# EAGLE board pcb_v37 (EAGLE 9.7.0)
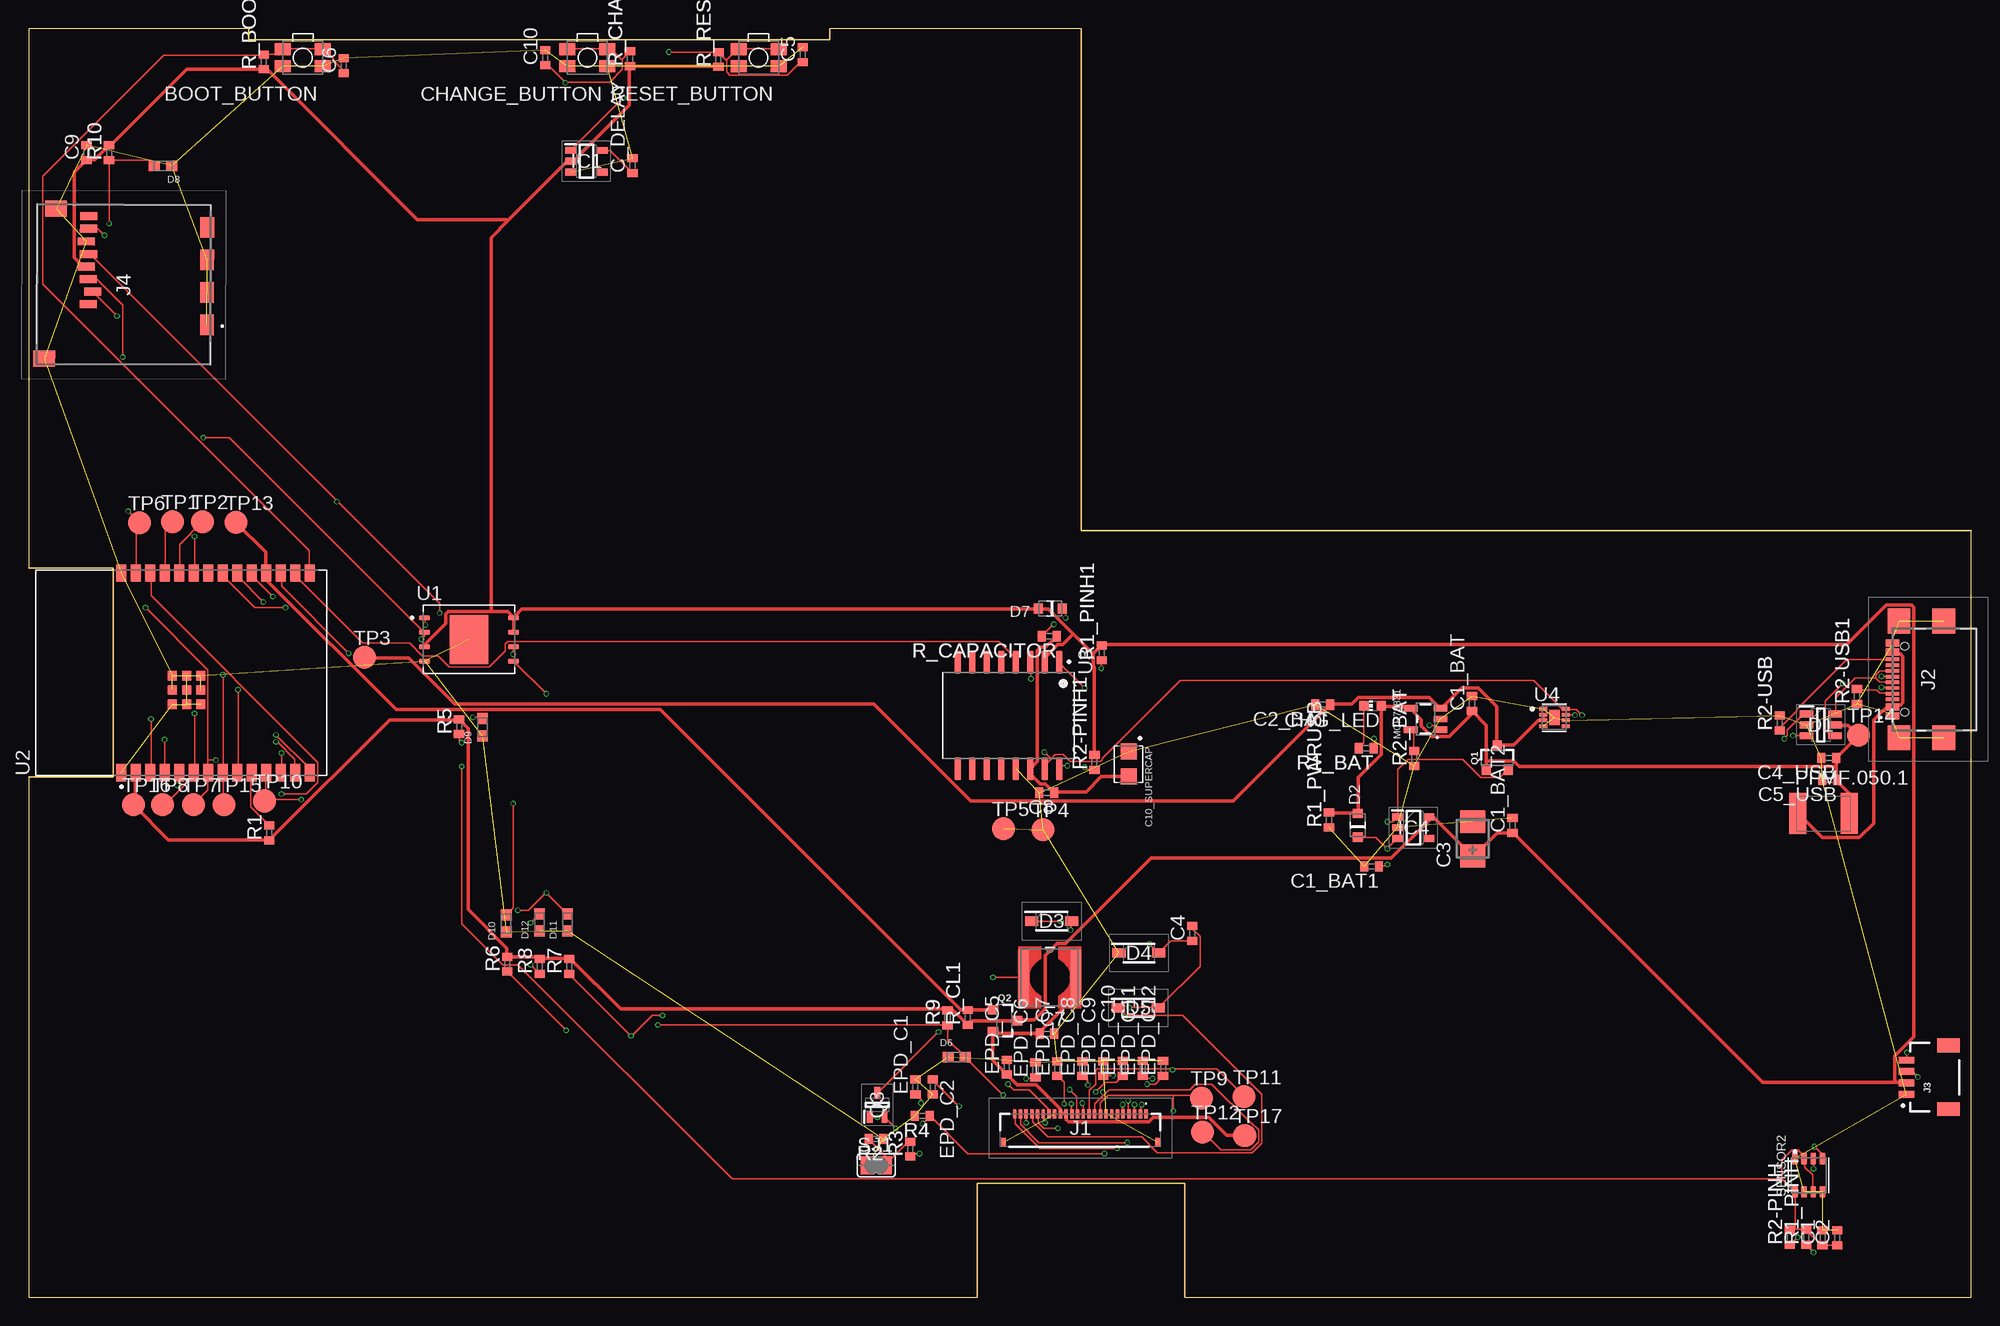
[diagram p0: board, top side]
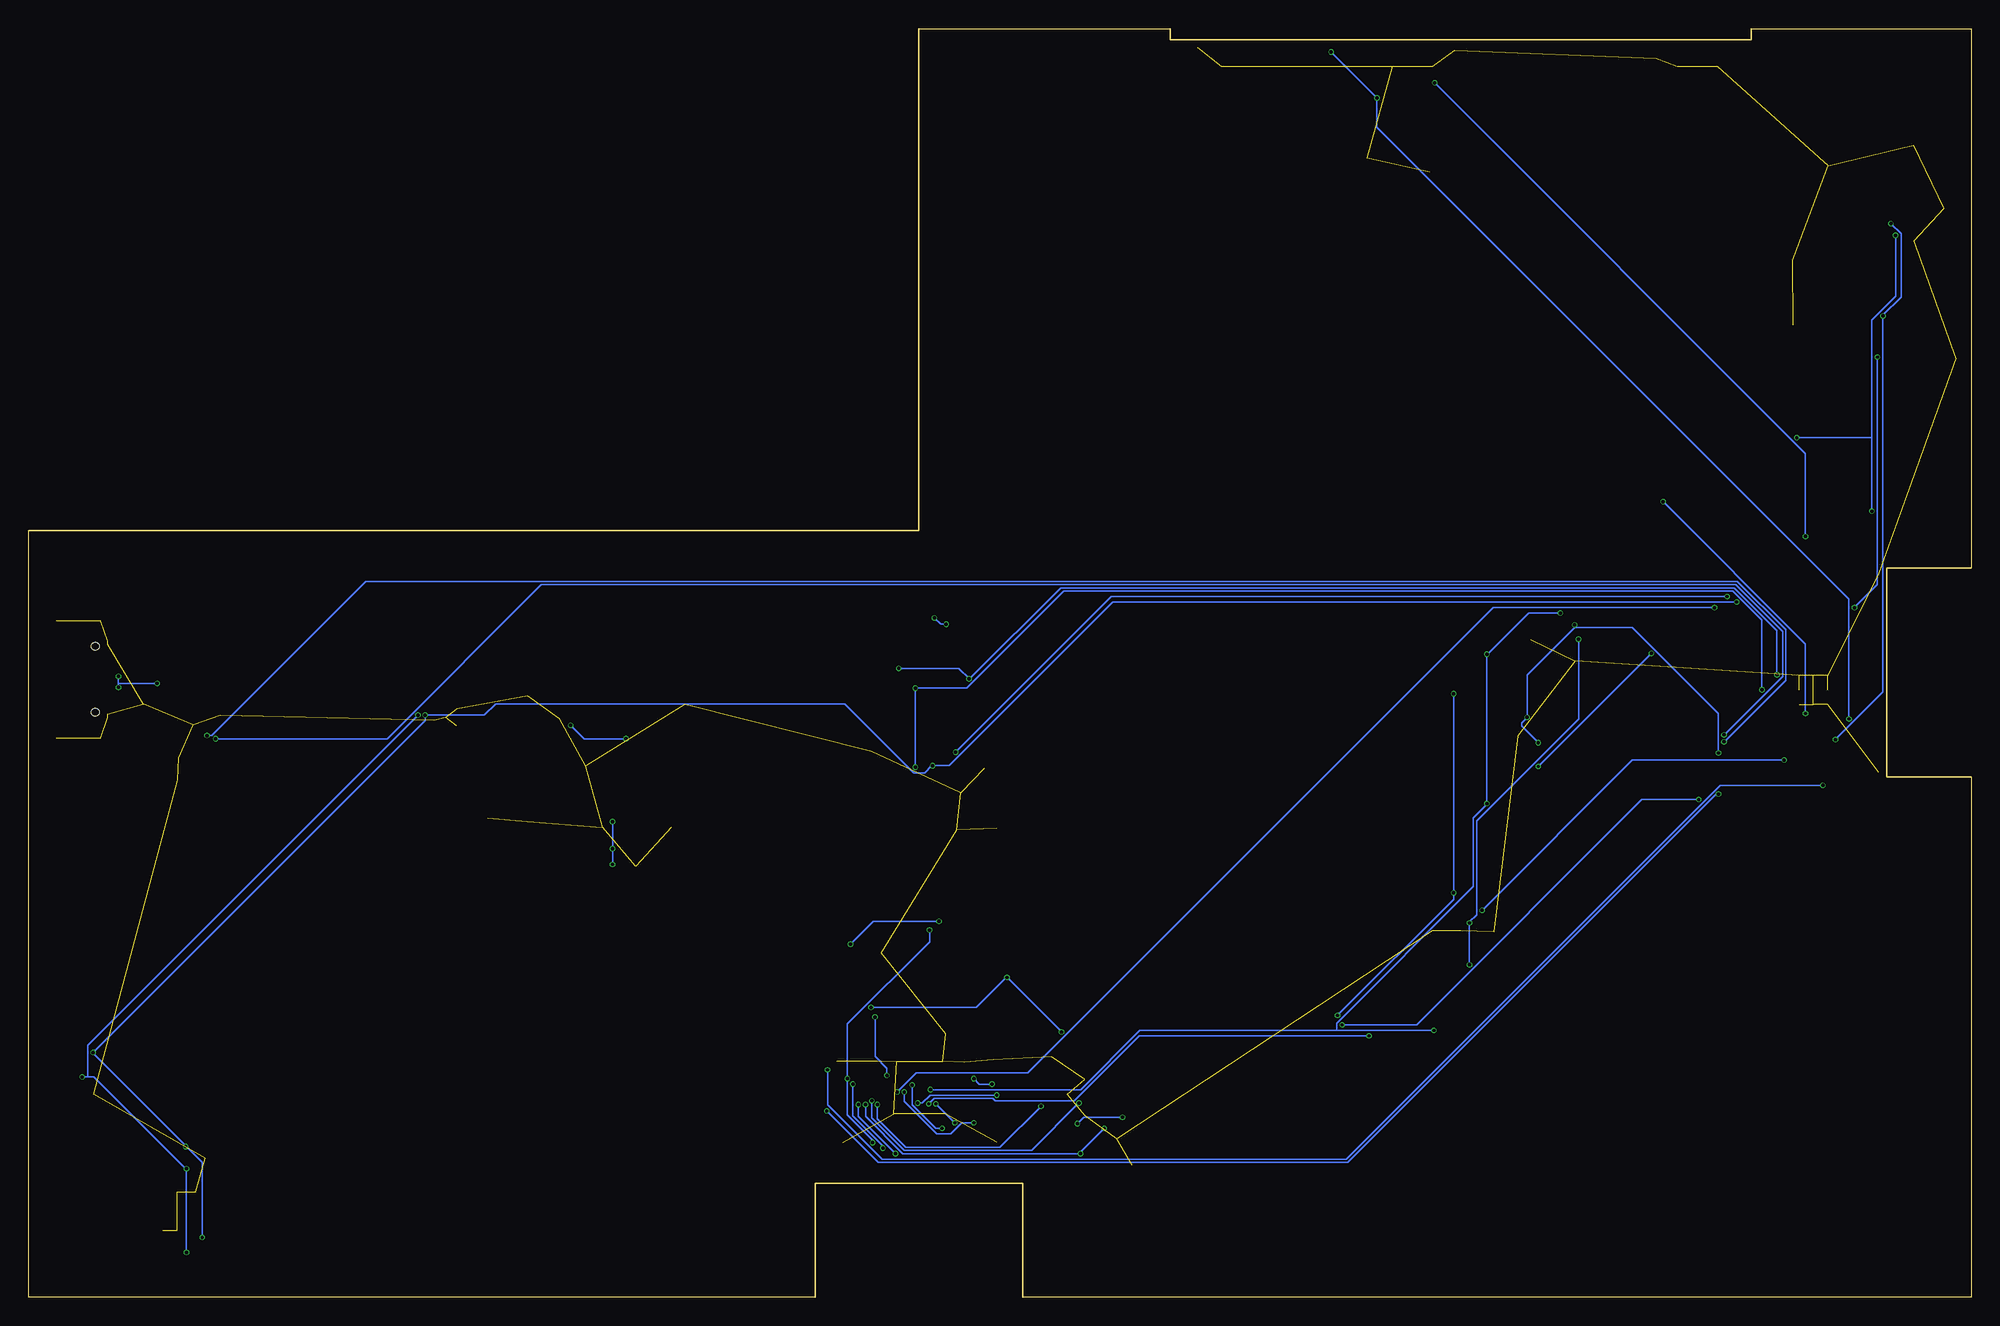
[diagram p1: board, bottom side, seen from below]

Size 170.2 x 111.2 mm. Coordinates in mm from the lower left corner, seen from the top.
Outline: 0,0 83.1,0 83.1,10 101.3,10 101.3,0 170.2,0 170.2,67.2 92.2,67.2 92.2,111.2 70.2,111.2 70.2,110.2 19.3,110.2 19.3,111.2 0,111.2 0,63.9 7.4,63.9 7.4,45.6 0,45.6 0,0
Copper layers (1*16): Top 0.035mm / dielectric 1.6mm / Bottom 0.035mm
Design rules "jlcpcb-2layers.dru": minimum track width 5mil, minimum drill 0.3mm, track to track 5mil, track to pad 5mil, pad to pad 5mil, via to via 5mil, smd to smd 5mil, copper to edge 0.2mm, drill to drill 6mil, minimum pad ring 10mil, minimum via ring 3mil, stop-mask expansion 4mil, vias tented up to drill 0mil, thermal gap 10mil
Net classes: 0 default: width 0.15 mm; 1 POWER: width 0.3 mm

## Footprints (pad centres in the part's own frame; a part is rotated, then mirrored left to right if it is on the bottom)
MYBUTTON = smd 1.4 x 1.05: 1 1.75,0.75; 2 -1.75,0.75; 3 -1.75,-0.75; 4 1.75,-0.75
ESP32_WROVER_EAGLE-LTSPICE_C0402 = smd 0.7 x 0.9: 1 -0.65,0; 2 0.65,0
RCL_CT3528 = smd 2 x 2.2: + -1.5,0; - 1.5,0
CAPCP3225X100N = smd 1.4 x 1.4: 1 -1.1,0; 2 1.1,0
ADAFRUIT_CHIP-LED0603 = smd 0.8 x 0.8: A 0,-0.75; C 0,0.75
SOT95P280X145-6N = smd 1.2 x 0.6: 1 -1.25,0.95; 2 -1.25,0; 3 -1.25,-0.95; 4 1.25,-0.95; 5 1.25,0; 6 1.25,0.95
ESP32_WROVER_AVX---SD0805S020S1R0_AVX_SD0805S020S1R0_0 = smd 0.8 x 0.9: 1 -1.05,0; 2 1.05,0
SOD3716X135N = smd 1.15 x 0.8: 1 -1.75,0; 2 1.75,0
DIOC1608X36N = smd 0.97 x 0.94: 1 -0.75,0; 2 0.75,0
SOT95P280X125-5N = smd 0.9 x 0.6: 1 -1.4,0.95; 2 -1.4,0; 3 -1.4,-0.95; 4 1.4,-0.95; 5 1.4,0.95
SOT95P280X120-5N = smd 0.9 x 0.6: 1 -1.4,0.95; 2 -1.4,0; 3 -1.4,-0.95; 4 1.4,-0.95; 5 1.4,0.95
FH34SRJ24S05SH99 = smd 0.3 x 0.8: 1 5.75,1.45; 2 5.25,1.45; 3 4.75,1.45; 4 4.25,1.45; 5 3.75,1.45; 6 3.25,1.45; 7 2.75,1.45; 8 2.25,1.45; 9 1.75,1.45; 10 1.25,1.45; 11 0.75,1.45; 12 0.25,1.45; 13 -0.25,1.45; 14 -0.75,1.45; 15 -1.25,1.45; 16 -1.75,1.45; 17 -2.25,1.45; 18 -2.75,1.45; 19 -3.25,1.45; 20 -3.75,1.45; 21 -4.25,1.45; 22 -4.75,1.45; 23 -5.25,1.45; 24 -5.75,1.45 | smd 0.4 x 0.8: MP1 6.75,-1.05; MP2 -6.75,-1.05
SAMACSYS_PARTS_USB4110GFA = smd 0.3 x 1.15: A1 -3.35,3.678; A4 -2.55,3.678; A5 -1.25,3.678; A6 -0.25,3.678; A7 0.25,3.678; A8 1.25,3.678; A9 2.55,3.678; A12 3.35,3.678; B1 3.05,3.678; B4 2.25,3.678; B5 1.75,3.678; B6 0.75,3.678; B7 -0.75,3.678; B8 -1.75,3.678; B9 -2.25,3.678; B12 -3.05,3.678 | smd 2.18 x 2: MP1 -5.11,-0.827; MP2 5.11,-0.827; MP3 -5.11,3.103; MP4 5.11,3.103 | hole 0.65: -2.89,2.603; 2.89,2.603
JST04_1MM_RA = smd 0.6 x 1.35: 1 -1.5,0; 2 -0.5,0; 3 0.5,0; 4 1.5,0 | smd 1.2 x 2: NC1 2.8,-3.675; NC2 -2.8,-3.675
112ATAARR03ATTEND = smd 1.8 x 1.2: G1 10.6,10.4; G2 4.9,10.4; S1 7.75,10.4; S2 2.05,10.4 | smd 1.4 x 1.9: G3 13.6,-3.85; G4 0.45,-2.85 | smd 0.7 x 1.5: P1 8.8,0; P2 7.7,0.4; P3 6.6,0; P4 5.5,-0.2; P5 4.4,0; P6 3.3,-0.2; P7 2.2,0; P8 1.1,0
IND_4828-WE-TPC_WRE = smd 0.889 x 4.826: 1 -2.286,0; 2 2.286,0
ESP32_WROVER_SPARKFUN-IC-POWER_SOT23-5 = smd 0.55 x 1.2: 1 -0.95,-1.3; 2 0,-1.3; 3 0.95,-1.3; 4 0.95,1.3; 5 -0.95,1.3
ESP32C6_VARISTOR_CT/CN1812 = smd 1.5 x 3.6: 1 -2.25,0; 2 2.25,0
ESP32_WROVER_SPARKFUN-DISCRETESEMI_SOT23-3 = smd 0.8 x 0.9: 1 -0.95,-1; 2 0.95,-1; 3 0,1.1
SOT65P210X110-3N = smd 1.05 x 0.5: 1 -1.05,0.65; 2 -1.05,-0.65; 3 1.05,0
ESP32_WROVER_EAGLE-LTSPICE_R0402 = smd 0.7 x 0.9: 1 -0.65,0; 2 0.65,0
ESP32_WROVER_BME680_PSON80P300X300X100-8N = smd 1.016 x 0.5: 1 1.458,1.2; 2 1.458,0.4; 3 1.458,-0.4; 4 1.458,-1.2; 5 -1.458,-1.22; 6 -1.458,-0.4; 7 -1.458,0.4; 8 -1.458,1.2
SJ = smd 1.168 x 1.6: 1 -0.762,0; 2 0.762,0
TP20R = smd 2 x 2: TP 0,0
SON127P600X800X80-9N = smd 0.94 x 0.44: 1 -3.895,1.905; 2 -3.895,0.635; 3 -3.895,-0.635; 4 -3.895,-1.905; 5 3.895,-1.905; 6 3.895,-0.635; 7 3.895,0.635; 8 3.895,1.905 | smd 3.4 x 4.3: 9 0,0
XCVR_ESP32-C6-WROOM-1-N8 = smd 1.5 x 0.9: 1 -8.75,5.26; 2 -8.75,3.99; 3 -8.75,2.72; 4 -8.75,1.45; 5 -8.75,0.18; 6 -8.75,-1.09; 7 -8.75,-2.36; 8 -8.75,-3.63; 9 -8.75,-4.9; 10 -8.75,-6.17; 11 -8.75,-7.44; 12 -8.75,-8.71; 13 -8.75,-9.98; 14 -8.75,-11.25; 15 8.75,-11.25; 16 8.75,-9.98; 17 8.75,-8.71; 18 8.75,-7.44; 19 8.75,-6.17; 20 8.75,-4.9; 21 8.75,-3.63; 22 8.75,-2.36; 23 8.75,-1.09; 24 8.75,0.18; 25 8.75,1.45; 26 8.75,2.72; 27 8.75,3.99; 28 8.75,5.26 | smd 0.8 x 0.8: 29_1 -2.755,0.79; 29_2 -1.505,0.79; 29_3 -0.255,0.79; 29_4 -2.755,-0.46; 29_5 -1.505,-0.46; 29_6 -0.255,-0.46; 29_7 -2.755,-1.71; 29_8 -1.505,-1.71; 29_9 -0.255,-1.71
SOIC127P1032X265-16N = smd 2.05 x 0.59: 1 -4.655,4.445; 2 -4.655,3.175; 3 -4.655,1.905; 4 -4.655,0.635; 5 -4.655,-0.635; 6 -4.655,-1.905; 7 -4.655,-3.175; 8 -4.655,-4.445; 9 4.655,-4.445; 10 4.655,-3.175; 11 4.655,-1.905; 12 4.655,-0.635; 13 4.655,0.635; 14 4.655,1.905; 15 4.655,3.175; 16 4.655,4.445
SON50P200X200X80-9N = smd 0.76 x 0.3: 1 -0.985,0.75; 2 -0.985,0.25; 3 -0.985,-0.25; 4 -0.985,-0.75; 5 0.985,-0.75; 6 0.985,-0.25; 7 0.985,0.25; 8 0.985,0.75 | smd 0.9 x 1.3: 9 0,0

## Placement (x,y rotation side)
BOOT_BUTTON  BUTTON_CUSYOMV1  [MYBUTTON]  24.03,108.65 180 top
C1  100nF  [ESP32_WROVER_EAGLE-LTSPICE_C0402]  157.16,5.23 90 top
C1_BAT  4.7uF  [ESP32_WROVER_EAGLE-LTSPICE_C0402]  126.45,52.05 90 top
C1_BAT1  4.7uF  [ESP32_WROVER_EAGLE-LTSPICE_C0402]  117.65,37.77 180 top
C1_BAT2  4.7uF  [ESP32_WROVER_EAGLE-LTSPICE_C0402]  129.99,41.37 90 top
C2  100nF  [ESP32_WROVER_EAGLE-LTSPICE_C0402]  158.44,5.23 90 top
C2_BAT  4.7uF  [ESP32_WROVER_EAGLE-LTSPICE_C0402]  113.36,51.95 180 top
C3  100uF TANT  [RCL_CT3528]  126.51,40.2 90 top
C4  4.7uF/25V  [ESP32_WROVER_EAGLE-LTSPICE_C0402]  101.95,31.89 90 top
C4_USB  100nF  [ESP32_WROVER_EAGLE-LTSPICE_C0402]  157.7,47.27 180 top
C5  1uF  [ESP32_WROVER_EAGLE-LTSPICE_C0402]  67.82,108.91 90 top
C5_USB  4.7uF  [ESP32_WROVER_EAGLE-LTSPICE_C0402]  157.78,45.35 180 top
C6  100nF  [ESP32_WROVER_EAGLE-LTSPICE_C0402]  27.62,107.93 90 top
C7  10uF  [ESP32_WROVER_EAGLE-LTSPICE_C0402]  89.22,23.11 0 top
C8  100nF  [ESP32_WROVER_EAGLE-LTSPICE_C0402]  89.2,44.23 180 top
C9  100nF  [ESP32_WROVER_EAGLE-LTSPICE_C0402]  5.08,100.33 90 top
C10  100nF  [ESP32_WROVER_EAGLE-LTSPICE_C0402]  45.26,108.63 90 top
C10_SUPERCAP  CPH3225A  [CAPCP3225X100N]  96.36,46.74 270 top
C_DELAY  100nF  [ESP32_WROVER_EAGLE-LTSPICE_C0402]  52.91,99.19 90 top
CHANGE_BUTTON  BUTTON_CUSYOMV1  [MYBUTTON]  48.96,108.63 180 top
CHG_LED  [ADAFRUIT_CHIP-LED0603]  117.74,51.85 90 top
D1  USBLC6-2SC6Y  [SOT95P280X145-6N]  157,50.17 0 top
D2  ESP32_WROVER_AVX---SD0805S020S1R0_AVX_SD0805S020S1R0_0_0AVX_SD0805S020S1R0_0_0  [ESP32_WROVER_AVX---SD0805S020S1R0_AVX_SD0805S020S1R0_0]  116.44,41.38 90 top
D3  MBR0530  [SOD3716X135N]  89.63,32.98 0 top
D4  MBR0530  [SOD3716X135N]  97.27,30.18 0 top
D5  MBR0530  [SOD3716X135N]  97.21,25.38 0 top
D6  PGB1010603MR  [DIOC1608X36N]  81.3,21.07 0 top
D7  ESP32_WROVER_AVX---SD0805S020S1R0_AVX_SD0805S020S1R0_0_0AVX_SD0805S020S1R0_0_0  [ESP32_WROVER_AVX---SD0805S020S1R0_AVX_SD0805S020S1R0_0]  89.49,60.38 180 top
D8  PGB1010603MR  [DIOC1608X36N]  11.78,99.17 180 top
D9  PGB1010603MR  [DIOC1608X36N]  39.76,49.97 90 top
D10  PGB1010603MR  [DIOC1608X36N]  41.84,32.77 90 top
D11  PGB1010603MR  [DIOC1608X36N]  47.22,32.87 90 top
D12  PGB1010603MR  [DIOC1608X36N]  44.75,32.88 90 top
EPD_C1  1uF/50V  [ESP32_WROVER_EAGLE-LTSPICE_C0402]  77.69,18.45 90 top
EPD_C2  1uF/50V  [ESP32_WROVER_EAGLE-LTSPICE_C0402]  79.2,18.45 270 top
EPD_C5  0.1uF/50V  [ESP32_WROVER_EAGLE-LTSPICE_C0402]  85.69,20.19 90 top
EPD_C6  1uF/50V  [ESP32_WROVER_EAGLE-LTSPICE_C0402]  88.21,19.95 90 top
EPD_C7  1uF/50V  [ESP32_WROVER_EAGLE-LTSPICE_C0402]  90.12,20.05 90 top
EPD_C8  1uF/50  [ESP32_WROVER_EAGLE-LTSPICE_C0402]  92.33,20.05 90 top
EPD_C9  1uF/50V  [ESP32_WROVER_EAGLE-LTSPICE_C0402]  94.14,20.05 90 top
EPD_C10  1uF/50V  [ESP32_WROVER_EAGLE-LTSPICE_C0402]  95.85,20.09 90 top
EPD_C11  1uF/50V  [ESP32_WROVER_EAGLE-LTSPICE_C0402]  97.61,20.07 90 top
EPD_C12  1uF/50V  [ESP32_WROVER_EAGLE-LTSPICE_C0402]  99.39,20.09 90 top
IC1  BD5229G-TR  [SOT95P280X125-5N]  48.87,99.57 0 top
IC4  XC6220A331MR-G  [SOT95P280X120-5N]  121.31,41.17 0 top
J1  FH34SRJ-24S-0.5SH_99_  [FH34SRJ24S05SH99]  92.14,14.64 0 top
J2  SAMACSYS_PARTS_USB4110-GF-A  [SAMACSYS_PARTS_USB4110GFA]  166.96,54.16 90 top
J3  QWIIC_RIGHT_ANGLE  [JST04_1MM_RA]  164.51,19.3 90 top
J4  112A-TAAR-R03_ATTEND  [112ATAARR03ATTEND]  5.27,95.84 269.8 top
L1  68uH  [IND_4828-WE-TPC_WRE]  89.47,28.05 0 top
MCP73831  ESP32_WROVER_SPARKFUN-IC-POWER_MCP73831  [ESP32_WROVER_SPARKFUN-IC-POWER_SOT23-5]  122.38,50.69 90 top
PFMF.050.1  ESP32C6_VARISTORCN1812  [ESP32C6_VARISTOR_CT/CN1812]  157.24,42.4 0 top
Q1  20V/4.2A/52mΩ/1.4W  [ESP32_WROVER_SPARKFUN-DISCRETESEMI_SOT23-3]  128.66,47.26 0 top
Q2  20V/4.2A/52mΩ/1.4W  [ESP32_WROVER_SPARKFUN-DISCRETESEMI_SOT23-3]  85.48,24.26 270 top
Q3  SI1308EDL-T1-GE3  [SOT65P210X110-3N]  74.34,16.88 90 top
R1  10K  [ESP32_WROVER_EAGLE-LTSPICE_R0402]  21.08,40.71 90 top
R1_BAT  200  [ESP32_WROVER_EAGLE-LTSPICE_R0402]  117.18,48.13 180 top
R1_PINH  10K  [ESP32_WROVER_EAGLE-LTSPICE_R0402]  155.73,5.27 90 top
R1_PINH1  10K  [ESP32_WROVER_EAGLE-LTSPICE_R0402]  94.01,56.49 90 top
R1_PWRUSB  100K  [ESP32_WROVER_EAGLE-LTSPICE_R0402]  113.92,41.84 90 top
R2  2.2  [ESP32_WROVER_EAGLE-LTSPICE_R0402]  74.24,13.91 180 top
R2-PINH  10K  [ESP32_WROVER_EAGLE-LTSPICE_R0402]  154.29,5.27 90 top
R2-PINH1  10K  [ESP32_WROVER_EAGLE-LTSPICE_R0402]  93.37,46.89 90 top
R2-USB  5K1  [ESP32_WROVER_EAGLE-LTSPICE_R0402]  153.4,50.33 90 top
R2-USB1  5K1  [ESP32_WROVER_EAGLE-LTSPICE_R0402]  160.17,52.67 90 top
R2_BAT  2K  [ESP32_WROVER_EAGLE-LTSPICE_R0402]  121.39,47.23 90 top
R3  0.47  [ESP32_WROVER_EAGLE-LTSPICE_R0402]  77.24,13.01 90 top
R4  10K  [ESP32_WROVER_EAGLE-LTSPICE_R0402]  78.3,15.91 180 top
R5  10K  [ESP32_WROVER_EAGLE-LTSPICE_R0402]  37.72,50.01 90 top
R6  10K  [ESP32_WROVER_EAGLE-LTSPICE_R0402]  41.94,29.21 90 top
R7  10K  [ESP32_WROVER_EAGLE-LTSPICE_R0402]  47.36,29.01 90 top
R8  10K  [ESP32_WROVER_EAGLE-LTSPICE_R0402]  44.78,29.01 90 top
R9  10K  [ESP32_WROVER_EAGLE-LTSPICE_R0402]  80.5,24.51 90 top
R10  10K  [ESP32_WROVER_EAGLE-LTSPICE_R0402]  7.06,100.31 90 top
R_BOOT  10k  [ESP32_WROVER_EAGLE-LTSPICE_R0402]  20.6,108.27 90 top
R_CAPACITOR  15  [ESP32_WROVER_EAGLE-LTSPICE_R0402]  89.42,57.94 180 top
R_CHANGE  10k  [ESP32_WROVER_EAGLE-LTSPICE_R0402]  52.69,108.54 90 top
R_CL1  10K  [ESP32_WROVER_EAGLE-LTSPICE_R0402]  82.28,24.53 90 top
R_RESET  10K  [ESP32_WROVER_EAGLE-LTSPICE_R0402]  60.43,108.49 90 top
RESET_BUTTON  BUTTON_CUSYOMV1  [MYBUTTON]  63.95,108.65 180 top
SENSOR2  ESP32_WROVER_BME680_BME680  [ESP32_WROVER_BME680_PSON80P300X300X100-8N]  155.94,10.72 90 top
SJ1  [SJ]  74.26,11.59 0 top
TP1  TPTP20R  [TP20R]  12.61,67.99 0 top
TP2  TPTP20R  [TP20R]  15.23,67.99 0 top
TP3  TPTP20R  [TP20R]  29.45,56.09 0 top
TP4  TPTP20R  [TP20R]  88.87,40.99 0 top
TP5  TPTP20R  [TP20R]  85.39,41.09 0 top
TP6  TPTP20R  [TP20R]  9.71,67.89 0 top
TP7  TPTP20R  [TP20R]  14.43,43.19 0 top
TP8  TPTP20R  [TP20R]  11.75,43.19 0 top
TP9  TPTP20R  [TP20R]  102.77,17.49 0 top
TP10  TPTP20R  [TP20R]  20.69,43.51 0 top
TP11  TPTP20R  [TP20R]  106.49,17.59 0 top
TP12  TPTP20R  [TP20R]  102.84,14.51 0 top
TP13  TPTP20R  [TP20R]  18.19,67.91 0 top
TP14  TPTP20R  [TP20R]  160.29,49.29 0 top
TP15  TPTP20R  [TP20R]  17.14,43.19 0 top
TP16  TPTP20R  [TP20R]  9.19,43.19 0 top
TP17  TPTP20R  [TP20R]  106.54,14.19 0 top
U1  W25Q512JVEIQ  [SON127P600X800X80-9N]  38.59,57.66 0 top
U2  ESP32-C6-WROOM-1-N8  [XCVR_ESP32-C6-WROOM-1-N8]  13.39,54.74 90 top
U3  DS3231SN#  [SOIC127P1032X265-16N]  85.85,51 270 top
U4  MAX17048G+T10  [SON50P200X200X80-9N]  133.67,50.82 0 top

## Library data of the parts
BOOT_BUTTON CHANGE_BUTTON CHG_LED PFMF.050.1 RESET_BUTTON SJ1 TP1-TP17 = DeskAssistant v19 v1
C1 C1_BAT C1_BAT1 C1_BAT2 C2 C2_BAT C4 C4_USB C5 C5_USB C6-C10 C_DELAY EPD_C1 EPD_C2 EPD_C5-EPD_C12 = DeskAssistant v19 v1; SPICEMODEL: NONE; SPICEPREFIX: C
C3 = DeskAssistant v19 v1; SPICEPREFIX: C
C10_SUPERCAP = DeskAssistant v19 v1; AVAILABILITY: Not in stock; CHECK_PRICES: https://www.snapeda.com/parts/CPH3225A/Seiko+Instruments/view-part/?ref=eda; DESCRIPTION: 11 mF (EDLC) Supercapacitor 3.3 V 1210 (3225 Metric) - -; MF: Seiko Instruments; MP: CPH3225A; PACKAGE: 1210 Seiko; PRICE: None; PURCHASE-URL: https://www.snapeda.com/api/url_track_click_mouser/?unipart_id=562593&manufacturer=Seiko Instruments&part_name=CPH3225A&search_term=None; SNAPEDA_LINK: https://www.snapeda.com/parts/CPH3225A/Seiko+Instruments/view-part/?ref=snap
D1 = DeskAssistant v19 v1; AVAILABILITY: In Stock; CHECK_PRICES: https://www.snapeda.com/parts/USBLC6-2SC6Y/STMicroelectronics/view-part/?ref=eda; DESCRIPTION: 17V Clamp 5A (8/20µs) Ipp Tvs Diode Surface Mount SOT-23-6; MF: STMicroelectronics; MP: USBLC6-2SC6Y; PACKAGE: SOT-23-6 STMicroelectronics; PRICE: None; SNAPEDA_LINK: https://www.snapeda.com/parts/USBLC6-2SC6Y/STMicroelectronics/view-part/?ref=snap
D2 D7 = DeskAssistant v19 v1; CENTROID_NOT_SPECIFIED: No; DATASHEET: http://datasheets.avx.com/schottky.pdf; DIGIKEY_DESCRIPTION: DIODE SCHOTTKY 20V 1A 0805; DIGIKEY_PART_NUMBER: 478-7800-1-ND; LEAD_FREE: yes; MF: AVX; MOUSER_PART_NUMBER: 581-SD0805S020S1R0; PACKAGE: 0805 (2012 metric); PREFIX: D; ROHS: yes; TEMPERATURE_RANGE_HIGH: +125°C; TEMPERATURE_RANGE_LOW: -55°C
D3-D5 = DeskAssistant v19 v1; AVAILABILITY: In Stock; CHECK_PRICES: https://www.snapeda.com/parts/MBR0530/Onsemi/view-part/?ref=eda; DESCRIPTION: Diode Schottky 30 V 500mA Surface Mount SOD-123; MF: ON Semiconductor; MP: MBR0530; PACKAGE: SOD-123-2 ON Semiconductor; PRICE: None; PURCHASE-URL: https://www.snapeda.com/api/url_track_click_mouser/?unipart_id=179458&manufacturer=ON Semiconductor&part_name=MBR0530&search_term=None; SNAPEDA_LINK: https://www.snapeda.com/parts/MBR0530/Onsemi/view-part/?ref=snap
D6 D8-D12 = DeskAssistant v19 v1; AVAILABILITY: In Stock; CHECK_PRICES: https://www.snapeda.com/parts/PGB1010603MR/Littelfuse/view-part/?ref=eda; DESCRIPTION: 150V (Typ) Clamp - Ipp Tvs Diode Surface Mount 0603 (1608 Metric); MF: Littelfuse Inc.; MP: PGB1010603MR; PACKAGE: 0603 Littelfuse Inc.; PRICE: None; PURCHASE-URL: https://www.snapeda.com/api/url_track_click_mouser/?unipart_id=5659453&manufacturer=Littelfuse Inc.&part_name=PGB1010603MR&search_term=None; SNAPEDA_LINK: https://www.snapeda.com/parts/PGB1010603MR/Littelfuse/view-part/?ref=snap
IC1 = DeskAssistant v19 v1; DESCRIPTION: Voltage Detector with Adjustable Delay Time: CMOS processes are utilized to develop high precision, low current consumption CMOS reset ICs that allow arbitrary setting of the delay time. The extensive lineup includes both Nch Open Drain and CMOS output types in a wide range of detection voltages (from 2.3V to 6.0V, in 0.1V steps), enabling selection of the ideal solution based on customer requirements. In addition, the entire series is of course both lead-free and RoHS-compliant.; HEIGHT: 1.25mm; MANUFACTURER_NAME: ROHM Semiconductor; MANUFACTURER_PART_NUMBER: BD5229G-TR; MOUSER_PART_NUMBER: 755-BD5229G-TR; MOUSER_PRICE-STOCK: https://www.mouser.co.uk/ProductDetail/ROHM-Semiconductor/BD5229G-TR?qs=4kLU8WoGk0vvnhrrYwdszw%3D%3D
IC4 = DeskAssistant v19 v1; DESCRIPTION: LDO Voltage Regulators; HEIGHT: 1.2mm; MANUFACTURER_NAME: Torex; MANUFACTURER_PART_NUMBER: XC6220A331MR-G; MOUSER_PART_NUMBER: 865-XC6220A331MR-G; MOUSER_PRICE-STOCK: https://www.mouser.co.uk/ProductDetail/Torex-Semiconductor/XC6220A331MR-G?qs=AsjdqWjXhJ8ZSWznL1J0gg%3D%3D
J1 = DeskAssistant v19 v1; DESCRIPTION: 24 Position FFC, FPC Connector Contacts, Top and Bottom 0.020" (0.50mm) Surface Mount, Right Angle; HEIGHT: 1.1mm; MANUFACTURER_NAME: Hirose; MANUFACTURER_PART_NUMBER: FH34SRJ-24S-0.5SH(99); MOUSER_PART_NUMBER: 798-FH34SRJ24S05SH99; MOUSER_PRICE-STOCK: https://www.mouser.co.uk/ProductDetail/Hirose-Connector/FH34SRJ-24S-0.5SH99?qs=vcbW%252B4%252BSTIpKBl5ap9J8Fw%3D%3D
J2 = DeskAssistant v19 v1; DESCRIPTION: CONN USB 2.0 TYPE-C R/A SMT; HEIGHT: 3.26mm; MANUFACTURER_NAME: GCT (GLOBAL CONNECTOR TECHNOLOGY); MANUFACTURER_PART_NUMBER: USB4110-GF-A; MOUSER_PART_NUMBER: 640-USB4110-GF-A; MOUSER_PRICE-STOCK: https://www.mouser.co.uk/ProductDetail/GCT/USB4110-GF-A?qs=KUoIvG%2F9IlYiZvIXQjyJeA%3D%3D
J3 = DeskAssistant v19 v1; PROD_ID: CONN-13694
J4 = DeskAssistant v19 v1; DESCRIPTION: Micro SD Card Socket, Push-Push Type, Top Mount, SMT, H=1.83mm, 10u; HEIGHT: 1.9mm; MANUFACTURER_NAME: ATTEND; MANUFACTURER_PART_NUMBER: 112A-TAAR-R03 ATTEND
L1 = DeskAssistant v19 v1; COPYRIGHT: Copyright (C) 2024 Ultra Librarian. All rights reserved.; MANUFACTURER_PART_NUMBER: 744043680; MFR_NAME: Wurth Electronics
MCP73831 = DeskAssistant v19 v1; PROD_ID: IC-09995
Q1 Q2 = DeskAssistant v19 v1; PROD_ID: TRAN-14388
Q3 = DeskAssistant v19 v1; AVAILABILITY: In Stock; CHECK_PRICES: https://www.snapeda.com/parts/SI1308EDL-T1-GE3/Vishay+Siliconix/view-part/?ref=eda; DESCRIPTION: Si1308EDL-T1-GE3 N-channel MOSFET Transistor, 1.5 A, 30 V, 3-Pin SC-70 | Siliconix / Vishay SI1308EDL-T1-GE3; MF: Vishay Siliconix; MP: SI1308EDL-T1-GE3; PACKAGE: SOT-323 Vishay Semiconductor; PRICE: None; PURCHASE-URL: https://www.snapeda.com/api/url_track_click_mouser/?unipart_id=274603&manufacturer=Vishay Siliconix&part_name=SI1308EDL-T1-GE3&search_term=None; SNAPEDA_LINK: https://www.snapeda.com/parts/SI1308EDL-T1-GE3/Vishay+Siliconix/view-part/?ref=snap
R1 R1_BAT R1_PINH R1_PINH1 R1_PWRUSB R2 R2-PINH R2-PINH1 R2-USB R2-USB1 R2_BAT R3-R10 R_BOOT R_CAPACITOR R_CHANGE R_CL1 R_RESET = DeskAssistant v19 v1; SPICEMODEL: NONE; SPICEPREFIX: R
SENSOR2 = DeskAssistant v19 v1; AVAILABILITY: Unavailable; DESCRIPTION: Integrated Environmental Unit; MF: Bosch Sensortec; MP: BME680; PACKAGE: LGA-8 Bosch Tools; PRICE: None
U1 = DeskAssistant v19 v1; AVAILABILITY: In Stock; CHECK_PRICES: https://www.snapeda.com/parts/W25Q512JVEIQ/Winbond+Electronics/view-part/?ref=eda; DESCRIPTION: FLASH - NOR Memory IC 512Mb (64M x 8) SPI - Quad I/O 133 MHz 8-WSON (8x6); MF: Winbond Electronics; MP: W25Q512JVEIQ; PACKAGE: Package; PRICE: None; SNAPEDA_LINK: https://www.snapeda.com/parts/W25Q512JVEIQ/Winbond+Electronics/view-part/?ref=snap
U2 = DeskAssistant v19 v1; AVAILABILITY: In Stock; CHECK_PRICES: https://www.snapeda.com/parts/ESP32-C6-WROOM-1-N8/Espressif+Systems/view-part/?ref=eda; DESCRIPTION: Multiprotocol Modules ESP32-C6 module, Wi-Fi 6 in 2.4 GHz band, Bluetooth 5, Zigbee 3.0 and Thread. ESP34-WROOM Compatible - ENGINEERING SAMPLE; MF: Espressif Systems; MP: ESP32-C6-WROOM-1-N8; PACKAGE: None; PRICE: None; SNAPEDA_LINK: https://www.snapeda.com/parts/ESP32-C6-WROOM-1-N8/Espressif+Systems/view-part/?ref=snap
U3 = DeskAssistant v19 v1; AVAILABILITY: In Stock; CHECK_PRICES: https://www.snapeda.com/parts/DS3231SN%23/Analog+Devices/view-part/?ref=eda; DESCRIPTION: Extremely Accurate I²C-Integrated RTC/TCXO/Crystal; MF: Analog Devices; MP: DS3231SN#; PACKAGE: SOIC-16 Maxim; PRICE: None; PURCHASE-URL: https://www.snapeda.com/api/url_track_click_mouser/?unipart_id=99048&manufacturer=Analog Devices&part_name=DS3231SN#&search_term=None; SNAPEDA_LINK: https://www.snapeda.com/parts/DS3231SN%23/Analog+Devices/view-part/?ref=snap
U4 = DeskAssistant v19 v1; AVAILABILITY: In Stock; CHECK_PRICES: https://www.snapeda.com/parts/MAX17048G+T10/Analog+Devices/view-part/?ref=eda; DESCRIPTION: 3µA 1-Cell/2-Cell Fuel Gauge with ModelGauge; MF: Analog Devices; MP: MAX17048G+T10; PACKAGE: TDFN-8 Maxim; PRICE: None; PURCHASE-URL: https://www.snapeda.com/api/url_track_click_mouser/?unipart_id=329239&manufacturer=Analog Devices&part_name=MAX17048G+T10&search_term=None; SNAPEDA_LINK: https://www.snapeda.com/parts/MAX17048G+T10/Analog+Devices/view-part/?ref=snap

## Nets
3V3 [POWER]: C1_BAT2.1 C3.+ C9.1 D7.2 IC1.2 IC4.5 J3.2 J4.P4 Q2.3 R1.1 R1_PINH1.2 R2-PINH1.2 R5.2 R6.2 R7.2 R8.2 R9.2 R10.2 R_BOOT.1 R_CHANGE.1 R_CL1.1 R_RESET.1 TP16.TP U1.3 U1.7 U1.8 U2.2 U3.2
32KHZ: R2-PINH1.1 U2.9 U3.1
DN: D1.4 J2.A7 J2.B7
DP: D1.6 J2.A6 J2.B6
EPD_3V3 [POWER]: C7.1 EPD_C5.1 J1.15 J1.16 L1.2 Q2.2 TP17.TP
EPD_3V3_C [POWER]: Q2.1 R_CL1.2 TP13.TP U2.18
EPD_BUSY: J1.9 TP9.TP U2.26
EPD_CS: D6.2 J1.12 R9.1 TP10.TP U2.11
EPD_DC: J1.11 TP11.TP U2.5
EPD_RST: J1.10 TP12.TP U2.21
FLASH_CS: D9.2 R5.1 U1.1 U2.12
GDR: J1.2 Q3.1 R4.1
GND: BOOT_BUTTON.1 BOOT_BUTTON.2 C1.2 C1_BAT1.2 C1_BAT2.2 C1_BAT.2 C2.2 C2_BAT.2 C3.- C4_USB.2 C5.2 C5_USB.2 C6.2 C7.2 C8.2 C9.2 C10.2 C10_SUPERCAP.1 C_DELAY.2 CHANGE_BUTTON.1 CHANGE_BUTTON.2 D1.2 D4.1 D6.1 D8.1 D9.1 D10.1 D11.1 D12.1 EPD_C1.2 EPD_C2.2 EPD_C5.2 EPD_C6.2 EPD_C7.2 EPD_C8.2 EPD_C9.2 EPD_C10.2 EPD_C11.2 EPD_C12.2 IC1.3 IC4.2 J1.8 J1.17 J1.MP1 J1.MP2 J2.A1 J2.A12 J2.B1 J2.B12 J2.MP1 J2.MP2 J2.MP3 J2.MP4 J3.1 J4.G1 J4.G2 J4.G3 J4.G4 J4.P6 MCP73831.2 R1_PWRUSB.1 R2-USB1.1 R2-USB.2 R2.1 R2_BAT.1 R4.2 RESET_BUTTON.1 RESET_BUTTON.2 SENSOR2.1 SENSOR2.5 SENSOR2.7 SJ1.1 TP4.TP TP5.TP U1.4 U1.9 U2.1 U2.28 U2.29_1 U2.29_2 U2.29_3 U2.29_4 U2.29_5 U2.29_6 U2.29_7 U2.29_8 U2.29_9 U3.13 U4.1 U4.4 U4.6 U4.9
GPIO8: R1.2 U2.10
I2C_PW: C1.1 C2.1 R1_PINH.2 R2-PINH.2 SENSOR2.2 SENSOR2.6 SENSOR2.8 U2.17
INT_RTC: R1_PINH1.1 TP15.TP U2.8 U3.3
IO/BOOT: BOOT_BUTTON.3 BOOT_BUTTON.4 C6.1 R_BOOT.2 U2.15
IO/CHANGE: C10.1 CHANGE_BUTTON.3 CHANGE_BUTTON.4 R_CHANGE.2 U2.23
MISO: D12.2 J4.P7 R8.1 TP6.TP U1.2 U2.27
MOSI: D11.2 J1.14 J4.P3 R7.1 TP7.TP U1.5 U2.7
N$3: C1_BAT1.1 D2.1 IC4.1 IC4.3 Q1.2
N$4: J2.B5 R2-USB.1
N$5: J2.A5 R2-USB1.2
N$6: MCP73831.1 R1_BAT.1
N$7: C4.1 D3.1 D4.2
N$8: CHG_LED.C R1_BAT.2
N$9: MCP73831.5 R2_BAT.2
N$10: EPD_C1.1 J1.4
N$11: EPD_C2.1 J1.5
N$12: EPD_C6.1 J1.18
N$13: EPD_C7.1 J1.19
N$14: EPD_C8.1 J1.20
N$15: EPD_C10.1 J1.22
N$16: C_DELAY.1 IC1.5
N$17: EPD_C12.1 J1.24
N$18: D7.1 R_CAPACITOR.2
PREVGH: D5.1 EPD_C9.1 J1.21
PREVGL: D3.2 EPD_C11.1 J1.23
RESE: J1.3 Q3.2 R3.1
RESE': R2.2 R3.2 SJ1.2
RESET: C5.1 IC1.1 R_RESET.2 RESET_BUTTON.3 RESET_BUTTON.4 U2.3
RTC_RST: U2.16 U3.4
RX: TP2.TP U2.24
SCK: D10.2 J1.13 J4.P5 R6.1 TP8.TP U1.6 U2.6
SCL: J3.4 R2-PINH.1 SENSOR2.4 U2.20 U3.16 U4.7
SDA: J3.3 R1_PINH.1 SENSOR2.3 U2.19 U3.15 U4.8
SRC: C4.2 D5.2 L1.1 Q3.3
SS_SD: D8.2 J4.P2 R10.1 U2.4
TX: TP1.TP U2.25
USB_D+: D1.1 U2.14
USB_D-: D1.3 U2.13
VBAT [POWER]: C2_BAT.1 MCP73831.3 Q1.3 TP3.TP U4.2 U4.3
VBUS [POWER]: C1_BAT.1 C4_USB.1 C5_USB.1 CHG_LED.A D1.5 D2.2 MCP73831.4 PFMF.050.1.2 Q1.1 R1_PWRUSB.2 TP14.TP
VRTC [POWER]: C8.1 C10_SUPERCAP.2 R_CAPACITOR.1 U3.14
VUSB [POWER]: J2.A4 J2.A9 J2.B4 J2.B9 PFMF.050.1.1

## Tracks (layer width: path | path; a pad name or v marks a point on that pad's centre or on a via)
3V3
  Top 0.3: J4.P4 4.99,90.37 4.78,90.37 4.02,91.13 4.02,98.61 4.99,99.58 C9.1 5.12,99.72 5.82,99.72 6.99,100.9 R10.2 7.2,100.97 13.85,107.61 20.57,107.61 R_BOOT.1 20.71,107.55 20.98,107.55 34.07,94.46 41.9,94.46 42.03,94.39 | 93.28,56.44 93.28,55.33 93.35,55.26 93.35,47.58 R2-PINH1.2 | 93.28,56.44 93.97,57.13 R1_PINH1.2 94.11,57.2 159.28,57.2 162.74,60.66 164.95,60.66 165.16,60.45 165.16,22.85 163.5,21.19 163.5,18.84 | 91.51,58.13 93.14,56.51 93.28,56.44 | 91.51,58.13 89.33,60.32 88.5,60.32 D7.2 88.29,60.32 43.21,60.32 42.59,59.69 U1.8 | 91.51,58.13 90.58,57.2 90.16,57.2 89.06,56.09 89.06,55.68 U3.2 | 40.53,60.11 41.97,60.11 42.45,59.62 U1.8 | 40.53,60.11 36.77,60.11 36.56,59.9 36.56,59.07 34.76,57.27 34.76,57.06 U1.3 | U1.7 42.52,58.31 42.52,59.42 U1.8 | R_RESET.1 60.39,107.89 52.84,107.89 R_CHANGE.1 52.63,107.82 52.63,104.5 47.71,99.58 47.51,99.58 IC1.2 47.37,99.51 47.16,99.51 42.03,94.39 | 40.53,60.11 40.53,92.89 42.03,94.39 | 163.5,18.84 151.94,18.84 130.12,40.65 C1_BAT2.1 128.67,40.72 126.66,38.71 C3.+ 126.45,38.71 123.06,42.1 122.71,42.1 IC4.5 122.64,41.97 122.64,41.76 119.39,38.5 98.33,38.5 90.86,31.02 90.09,31.02 89.06,29.98 89.06,25.28 88.09,24.31 86.7,24.31 Q2.3 86.56,24.24 82.68,24.24 82.41,23.96 R_CL1.1 81.02,25.14 80.54,25.14 R9.2 80.4,25.28 51.87,25.28 47.51,29.64 R7.2 47.3,29.71 44.8,29.71 R8.2 44.74,29.85 41.97,29.85 R6.2 41.9,29.98 41.9,30.61 38.5,34 38.5,49.86 37.81,50.55 R5.2 37.67,50.62 31.65,50.62 21.19,40.16 R1.1 21.05,40.1 12.26,40.1 9.21,43.14 TP16.TP 9.35,43.21 9.35,45.98 U2.2 | 163.5,18.84 164.47,18.84 J3.2
32KHZ  (via drill 0.3)
  Top 0.15: v92.52,46.47 92.73,46.26 93.35,46.26 R2-PINH1.1 | v92.52,53.39 90.3,55.61 U3.1 | v18.35,53.25 18.35,46.05 U2.9
  Bottom 0.15: v92.52,46.47 v92.52,53.39 88.02,53.39 79.5,61.91 20.91,61.91 18.35,59.35 v18.35,53.25
DN  (via drill 0.3)
  Top 0.15: v162.32,53.46 163.22,53.46 J2.B7 | v162.32,54.43 163.22,54.43 J2.A7 | v158.93,53.81 157.41,52.28 157.41,49.79 157.96,49.24 158.24,49.24 D1.4
  Bottom 0.15: v162.32,54.43 162.32,53.81 | 162.32,53.81 v162.32,53.46 | 162.32,53.81 v158.93,53.81
DP
  Top 0.15: 161.84,54.29 162.18,53.95 163.22,53.95 J2.A6 | 161.84,54.29 161.84,54.57 162.18,54.91 163.22,54.91 J2.B6 | 161.84,54.29 160.04,54.29 158.31,52.56 158.31,51.18 D1.6
EPD_3V3
  Top 0.3: TP17.TP 106.51,14.2 104.98,14.2 103.39,15.79 98.54,15.79 98.13,15.37 91.13,15.37 90.92,15.58 90.92,16 J1.15 90.86,16.14 90.44,16.14 J1.16 90.37,16.27 90.37,16.55 88.29,18.63 86.63,18.63 85.8,19.46 EPD_C5.1 85.66,19.6 84.48,20.77 84.48,23.27 Q2.2 84.62,23.13 88.5,23.13 C7.1 88.57,23.27 91.76,26.45 L1.2
EPD_3V3_C
  Top 0.3: Q2.1 84.42,25.21 82.34,25.21 R_CL1.2 82.13,25.21 81.65,25.21 55.33,51.52 32.2,51.52 20.84,62.88 20.84,63.36 U2.18 20.77,63.5 20.77,65.3 18.21,67.86 TP13.TP
EPD_BUSY  (via drill 0.3)
  Top 0.15: 100.27,17.73 102.56,17.73 102.77,17.52 TP9.TP | 100.27,17.73 94.6,17.73 93.9,17.04 93.9,16.14 J1.9 | v22.16,44.11 24.31,44.11 25.35,45.15 25.35,46.88 10.73,61.49 10.73,63.43 U2.26 | 100.27,17.73 v100.27,16.34
  Bottom 0.15: v22.16,44.11 22.37,44.11 54.64,11.84 95.77,11.84 v100.27,16.34
EPD_CS  (via drill 0.3)
  Top 0.15: U2.11 20.77,45.98 20.77,43.63 20.71,43.56 TP10.TP 20.84,43.63 v23.89,43.63 | v92.31,17.04 92.38,16.97 92.38,16.14 J1.12 | v85.39,17.73 82.06,21.05 D6.2 81.99,21.12 80.54,22.58 80.54,23.82 R9.1 80.47,23.89 v55.12,23.89
  Bottom 0.15: v92.31,17.04 91.89,17.04 91.2,17.73 v85.39,17.73 | v23.89,43.63 28.88,43.63 48.61,23.89 v55.12,23.89
EPD_DC  (via drill 0.3)
  Top 0.15: 100.2,20.01 104.08,20.01 106.44,17.66 TP11.TP | 100.2,20.01 93.63,20.01 93.49,19.88 93.49,18.7 92.93,18.14 92.93,16.14 J1.11 | v13.02,44.87 13.16,45.01 13.16,45.98 U2.5 | v100.2,19.94 100.2,20.01
  Bottom 0.15: v13.02,44.87 22.02,44.87 54.78,12.12 95.43,12.12 100.2,16.9 v100.2,19.94
EPD_RST  (via drill 0.3)
  Top 0.15: 94.28,17.83 94.67,18.21 101.73,18.21 102.21,18.7 103.67,18.7 107.06,15.3 107.13,15.3 107.75,14.68 107.75,13.64 107.06,12.95 104.43,12.95 102.91,14.47 TP12.TP | 94.28,17.83 93.42,16.97 93.42,16.14 J1.10 | v22.51,60.45 19.8,60.45 17.04,63.23 17.04,63.43 U2.21 | 94.28,17.83 v94.11,18
  Bottom 0.15: v22.51,60.45 41.9,60.45 82.68,19.67 92.45,19.67 v94.11,18
FLASH_CS  (via drill 0.3)
  Top 0.15: v37.95,48.61 37.74,48.82 37.74,49.31 R5.1 | v38.92,50.83 39.68,50.83 39.75,50.76 D9.2 | v34.76,58.93 34.76,59.55 U1.1 | v22.16,47.71 22.16,46.05 U2.12
  Bottom 0.15: v37.95,48.61 39.4,50.07 39.4,50.34 v38.92,50.83 38.92,54.57 34.76,58.72 v34.76,58.93 34.69,58.72 29.71,58.72 22.16,51.18 v22.16,47.71
GDR  (via drill 0.3)
  Top 0.15: v97.5,16.9 97.44,16.83 97.44,16.14 J1.2 | v94.25,12.6 82.27,12.6 79.01,15.86 R4.1 78.94,15.86 v78.32,15.23 | v74.37,15.79 73.75,15.79 Q3.1
  Bottom 0.15: v97.5,16.9 97.5,15.86 v94.25,12.6 | v74.37,15.79 77.77,15.79 v78.32,15.23
GND  (91 unrouted)
GPIO8
  Top 0.15: R1.2 21.05,41.41 19.46,43 19.46,45.91 19.53,45.98 U2.10
I2C_PW  (via drill 0.3)
  Top 0.15: SENSOR2.6 156.3,9.28 156.3,10.73 155.6,11.43 155.6,12.12 SENSOR2.2 155.47,12.19 155.47,12.46 154.98,12.95 154.5,12.95 153.6,12.05 153.6,10.39 | C2.1 158.38,4.57 157.2,4.57 C1.1 157.13,4.64 156.99,4.64 155.74,5.89 R1_PINH.2 155.67,5.96 154.77,5.96 | 154.77,5.96 154.36,5.96 R2-PINH.2 | 154.77,5.96 154.77,9.21 SENSOR2.8 154.7,9.28 153.6,10.39 | v28.05,56.44 22.16,62.33 22.16,63.43 U2.17 | v37.95,46.54 37.95,32.76 41.55,29.15 42.87,29.15 61.63,10.39 153.6,10.39
  Bottom 0.15: v37.95,46.54 v28.05,56.44
INT_RTC  (via drill 0.3)
  Top 0.15: TP15.TP 17.11,43.21 17.04,43.28 17.04,45.98 U2.8 17.04,46.05 v17.04,54.57 | v93.97,55.12 93.97,55.82 R1_PINH1.1 | v87.81,54.22 87.81,55.61 U3.3
  Bottom 0.15: v93.97,55.12 88.71,55.12 v87.81,54.22 87.74,54.22 79.78,62.19 20.77,62.19 17.04,58.45 v17.04,54.57
IO/BOOT
  Top 0.15: C6.1 27.56,107.34 27.56,107.55 26.73,108.38 26.73,108.52 25.83,109.42 BOOT_BUTTON.3 25.76,109.42 22.3,109.42 BOOT_BUTTON.4 22.23,109.35 21.81,108.93 20.64,108.93 R_BOOT.2 20.57,108.86 11.84,108.86 1.25,98.27 1.25,88.78 24.58,65.44 24.58,63.5 U2.15
IO/CHANGE  (via drill 0.3)
  Top 0.15: CHANGE_BUTTON.4 47.23,109.42 50.69,109.42 CHANGE_BUTTON.3 50.76,109.35 51.11,109.35 51.94,108.52 52.01,108.52 | 47.02,106.51 45.57,107.96 45.29,107.96 C10.1 | 47.02,106.51 50.9,106.51 52.01,107.61 52.01,108.52 | 52.01,108.52 52.63,109.14 R_CHANGE.2 | v14.54,66.69 14.54,63.5 U2.23 | v47.02,106.44 47.02,106.51
  Bottom 0.15: v14.54,66.69 14.54,73.96 v47.02,106.44
MISO  (via drill 0.3)
  Top 0.15: U2.27 9.42,63.5 9.42,67.59 9.7,67.86 TP6.TP 9.7,67.93 v8.73,68.9 | v6.65,93.07 6.09,93.63 5.26,93.63 J4.P7 | v43.97,29.15 44.74,28.39 R8.1 | v43.97,32.83 44.74,33.59 D12.2 | v34.42,57.69 34.69,57.96 34.69,58.24 U1.2 34.62,58.31 17.59,75.34 v15.3,75.34
  Bottom 0.15: v6.65,93.07 6.65,87.74 8.73,85.66 8.73,75.34 | v8.73,68.9 8.73,75.34 | v43.97,29.15 v43.97,32.83 43.97,32.89 43.35,33.52 43.35,41.76 34.42,50.69 v34.42,57.69 | v15.3,75.34 8.73,75.34
MOSI  (via drill 0.3)
  Top 0.15: TP7.TP 14.47,43.21 15.72,44.46 15.72,45.98 U2.7 15.72,46.05 15.72,47.09 | v8.24,82.41 8.24,86.98 6.03,89.19 5.26,89.19 J4.P3 | v10.25,60.45 15.72,54.98 15.72,47.09 | v45.36,52.91 42.52,55.75 U1.5 | D11.2 47.16,33.66 v45.36,35.46 45.29,35.46 43.77,33.93 v42.87,33.93 | v91.34,16.97 91.34,16.14 J1.14 | R7.1 47.37,28.32 v52.77,22.92 52.84,22.92 54.64,24.72 v55.54,24.72 | v16.41,47.09 15.72,47.09
  Bottom 0.15: v8.24,82.41 8.24,62.46 v10.25,60.45 | v45.36,52.91 v45.36,35.46 45.36,34.9 v55.54,24.72 | v91.34,16.97 90.86,17.45 85.73,17.45 85.52,17.24 78.6,17.24 72.92,22.92 v52.77,22.92 | v16.41,47.09 29.71,47.09 v42.87,33.93
N$3  (via drill 0.3)
  Top 0.15: v119.04,37.95 118.9,37.81 118.35,37.81 C1_BAT1.1 | IC4.3 119.87,40.16 v119.04,39.33 118.97,39.33 118,40.3 116.48,40.3 D2.1 | Q1.2 129.57,46.26 128.87,45.57 127.21,45.57 125.62,47.16 120.84,47.16 119.94,46.26 119.94,42.17 IC4.1 119.87,42.1 119.46,41.69 v119.04,41.69
  Bottom 0.15: v119.04,37.95 v119.04,39.33 v119.04,41.69
N$4
  Top 0.15: R2-USB.1 153.46,49.72 153.46,49.93 154.91,51.38 154.91,51.52 159.28,55.88 163.22,55.88 J2.B5
N$5
  Top 0.15: R2-USB1.2 160.18,53.25 161.91,53.25 162.18,52.98 163.22,52.98 J2.A5
N$6  (via drill 0.3)
  Top 0.15: v117.86,48.96 117.86,48.2 R1_BAT.1 | v122.71,50.14 123.27,50.14 123.61,49.79 MCP73831.1
  Bottom 0.15: v117.86,48.96 121.53,48.96 v122.71,50.14
N$7  (via drill 0.3)
  Top 0.15: C4.1 101.94,31.23 100.07,31.23 99.03,30.19 D4.2 98.96,30.19 v98.2,30.95 | v90.44,32.96 87.95,32.96 D3.1
  Bottom 0.15: v90.44,32.96 96.19,32.96 v98.2,30.95
N$8
  Top 0.15: CHG_LED.C 116.96,51.8 116.96,48.61 116.55,48.2 R1_BAT.2
N$9
  Top 0.15: R2_BAT.2 121.33,47.92 121.33,49.51 121.12,49.72 MCP73831.5
N$10  (via drill 0.3)
  Top 0.15: v96.33,17.24 96.33,16.14 J1.4 | v78.18,17.04 78.18,17.31 EPD_C1.1
  Bottom 0.15: v96.33,17.24 96.33,15.72 93.49,12.88 82.34,12.88 v78.18,17.04
N$11  (via drill 0.3)
  Top 0.15: v95.84,16.9 95.84,16.14 J1.5 | v81.51,16.76 79.22,19.04 EPD_C2.1
  Bottom 0.15: v95.84,16.9 95.84,15.65 93.35,13.16 85.11,13.16 v81.51,16.76
N$12  (via drill 0.3)
  Top 0.15: v85.8,18.7 86.28,18.21 87.67,18.21 89.33,16.55 89.33,16.14 J1.18 | v87.39,19.18 88.09,19.18 88.16,19.25 EPD_C6.1
  Bottom 0.15: v85.8,18.7 86.91,18.7 v87.39,19.18
N$13  (via drill 0.3)
  Top 0.15: v89.06,15.3 88.92,15.44 88.92,16.07 J1.19 | v90.72,16.97 90.72,18.84 90.16,19.39 EPD_C7.1
  Bottom 0.15: v90.72,16.97 v89.06,15.3
N$14  (via drill 0.3)
  Top 0.15: v90.16,14.82 88.92,14.82 88.43,15.3 88.43,16.07 J1.20 | v92.8,18.63 92.8,18.97 92.38,19.39 EPD_C8.1
  Bottom 0.15: v90.16,14.82 90.72,14.82 92.8,16.9 v92.8,18.63
N$15  (via drill 0.3)
  Top 0.15: v87.39,15.3 87.39,16.07 J1.22 | v93.49,18 94.32,18.84 95.29,18.84 95.84,19.39 EPD_C10.1
  Bottom 0.15: v87.39,15.3 88.43,15.3 89.4,14.34 90.65,14.34 93.49,17.17 v93.49,18
N$16
  Top 0.15: IC1.5 50.28,100.48 50.97,100.48 C_DELAY.1
N$17  (via drill 0.3)
  Top 0.15: v95.36,13.09 88.57,13.09 86.42,15.23 86.42,16.07 J1.24 | v97.99,18.7 98.68,18.7 99.37,19.39 EPD_C12.1
  Bottom 0.15: v95.36,13.09 95.36,13.3 97.99,15.93 v97.99,18.7
N$18  (via drill 0.3)
  Top 0.15: v89.82,59 88.78,57.96 R_CAPACITOR.2 | v90.86,59.55 90.86,60.04 90.58,60.32 D7.1
  Bottom 0.15: v89.82,59 90.3,59 v90.86,59.55
PREVGH  (via drill 0.3)
  Top 0.15: 96.12,24.72 101.11,24.72 108.03,17.8 108.03,13.5 107.2,12.67 98.89,12.67 97.5,14.06 89.26,14.06 87.95,15.37 87.95,16.07 J1.21 | 96.12,24.72 95.5,25.35 D5.1 | v95.01,19.46 94.18,19.46 EPD_C9.1 | v96.05,24.58 96.12,24.65 96.12,24.72
  Bottom 0.15: v95.01,19.46 95.01,20.08 96.05,21.12 v96.05,24.58
PREVGL  (via drill 0.3)
  Top 0.15: v96.26,13.57 88.5,13.57 86.91,15.17 86.91,16.07 J1.23 | v98.47,19.18 97.85,19.18 97.64,19.39 EPD_C11.1 | v91.27,32.2 91.34,32.27 91.34,32.96 D3.2
  Bottom 0.15: v96.26,13.57 96.26,13.78 98.47,16 v98.47,19.18 98.47,23.96 91.27,31.16 v91.27,32.2
RESE  (via drill 0.3)
  Top 0.15: v96.88,16.9 96.88,16.14 J1.3 | v78.05,12.6 77.49,12.6 77.28,12.4 R3.1 | v75.97,14.82 75,15.79 Q3.2
  Bottom 0.15: v96.88,16.9 96.88,15.86 93.63,12.6 v78.05,12.6 78.11,12.67 v75.97,14.82
RESE'
  Top 0.15: R3.2 77.21,13.64 77.08,13.64 75.07,11.63 SJ1.2 75.41,12.05 73.61,13.85 R2.2
RESET  (via drill 0.3)
  Top 0.15: v52.08,105.12 47.51,100.55 IC1.1 | v56.09,109.14 60.39,109.14 R_RESET.2 60.45,109.07 61.15,108.38 | 61.15,108.38 61.15,107.41 61.42,107.13 66.48,107.13 67.3,107.95 C5.1 | 61.15,108.38 61.15,108.44 62.05,109.35 62.19,109.35 RESET_BUTTON.4 62.26,109.42 65.65,109.42 RESET_BUTTON.3 | v10.73,50.69 10.73,46.05 U2.3
  Bottom 0.15: v56.09,109.14 v52.08,105.12 52.08,102.56 10.73,61.22 v10.73,50.69
RTC_RST
  Top 0.15: U2.16 23.41,63.43 23.41,63.23 29.29,57.34 33.38,57.34 34.49,56.23 35.87,56.23 36.84,55.26 40.37,55.26 41.76,56.65 41.76,57.27 41.97,57.48 84.97,57.48 86.42,56.02 86.42,55.68 U3.4
RX
  Top 0.15: U2.24 13.23,63.5 13.23,66 15.17,67.93 TP2.TP
SCK  (via drill 0.3)
  Top 0.15: v91.2,18.21 91.83,17.59 91.83,16.14 J1.13 | v47.09,23.41 41.97,28.53 R6.1 | TP8.TP 11.77,43.21 11.98,43.21 14.47,45.7 U2.6 14.54,46.05 v14.54,51.18 | v42.45,56.37 42.45,56.99 U1.6 | v42.45,43.28 42.45,34.14 41.9,33.59 D10.2 | 27.04,69.77 36.01,60.8 v36.01,59.97 | 27.04,69.77 5.4,91.41 5.26,91.41 J4.P5 | v27.01,69.73 27.04,69.77
  Bottom 0.15: v91.2,18.21 78.05,18.21 72.85,23.41 55.61,23.41 | v47.09,23.41 55.61,23.41 | v36.01,59.97 38.78,59.97 42.38,56.37 v42.45,56.37 v42.45,43.28 42.45,43.21 43.63,42.03 43.63,36.01 55.61,24.03 55.61,23.41 | v14.54,51.18 14.54,57.27 v27.01,69.73
SCL  (via drill 0.3)
  Top 0.15: v135.45,51.04 134.69,51.04 U4.7 | v164.54,21.47 164.54,20.84 J3.4 | v154.98,5.26 154.36,4.64 R2-PINH.1 | v156.44,13.23 157.13,12.53 157.13,12.19 SENSOR2.4 | v20.57,60.94 18.35,63.16 18.35,63.43 U2.20 | v91,46.6 90.51,46.6 90.3,46.4 U3.16
  Bottom 0.15: v154.98,5.26 154.98,11.84 156.4,13.26 | 156.4,13.26 164.54,21.4 v164.54,21.47 135.45,50.55 v135.45,51.04 130.26,51.04 129.29,52.01 98.68,52.01 92.66,45.98 91.69,45.98 91.06,46.6 v91,46.6 89.54,46.6 75.21,60.94 v20.57,60.94 | v156.44,13.23 156.4,13.26
SDA  (via drill 0.3)
  Top 0.15: v156.37,3.95 155.74,4.57 R1_PINH.1 | v156.37,11.29 156.37,12.12 SENSOR2.3 | v165.51,19.32 165.09,19.74 164.54,19.74 J3.3 | 89.58,47.19 89.06,46.67 89.06,46.4 U3.15 | 89.58,47.19 89.96,47.58 90.65,47.58 91.27,46.95 93.9,46.95 94.04,47.09 94.04,47.23 100.9,54.08 131.85,54.08 134.34,51.59 134.62,51.59 U4.8 134.69,51.52 135.59,51.52 v136.08,51.04 | v21.4,61.42 19.6,63.23 19.6,63.43 U2.19 | 89.58,47.19 v88.99,47.78
  Bottom 0.15: v156.37,3.95 v156.37,11.29 156.44,11.29 164.47,19.32 165.02,19.32 | 165.02,19.32 v165.51,19.32 | v21.4,61.42 75.34,61.42 v88.99,47.78 | 165.02,19.32 165.02,22.09 v136.08,51.04
SRC  (via drill 0.3)
  Top 0.15: C4.2 102,32.48 102,32.27 102.63,31.65 102.63,29.02 99.03,25.41 D5.2 98.96,25.41 v96.4,25.41 | v79.71,23.27 74.37,17.94 Q3.3 | v84.48,28.05 L1.1
  Bottom 0.15: v79.71,23.27 v84.48,28.05 84.55,28.05 87.19,25.41 v96.4,25.41
SS_SD  (via drill 0.3)
  Top 0.15: D8.2 11.01,99.23 10.6,99.65 R10.1 7.06,99.58 v7.06,94.11 | v11.91,48.89 11.91,46.05 U2.4 | v7.76,86.01 5.68,88.09 J4.P2
  Bottom 0.15: v11.91,48.89 7.76,53.05 v7.76,86.01 7.76,86.08 6.16,87.67 6.16,93.21 v7.06,94.11
TX
  Top 0.15: U2.25 11.98,63.5 11.98,67.31 12.6,67.93 TP1.TP
USB_D+  (via drill 0.3)
  Top 0.15: v153.8,48.96 154.08,49.24 154.08,49.72 155.47,51.11 155.74,51.11 D1.1 | v21.68,49.31 24.58,46.4 24.58,46.05 U2.14
  Bottom 0.15: v153.8,48.96 138.78,48.96 125.27,62.46 20.64,62.46 16.55,58.38 16.55,54.43 v21.68,49.31
USB_D-  (via drill 0.3)
  Top 0.15: v154.57,49.24 155.74,49.24 D1.3 | v21.68,48.68 21.81,48.68 23.34,47.16 23.34,46.05 U2.13
  Bottom 0.15: v154.57,49.24 154.15,49.24 140.65,62.74 20.5,62.74 16.27,58.52 16.27,54.08 v21.68,48.68
VBAT
  Top 0.3: U4.2 132.68,51.04 132.68,50.62 U4.3 132.54,50.55 132.27,50.55 130.12,48.41 128.67,48.41 Q1.3 128.6,48.54 128.6,51.8 127,53.39 125.55,53.39 123.82,51.66 MCP73831.3 123.61,51.66 122.71,52.56 116.48,52.56 115.92,52.01 114.06,52.01 C2_BAT.1 113.92,51.87 105.54,43.49 82.55,43.49 74.03,52.01 37.33,52.01 33.31,56.02 29.5,56.02 TP3.TP
VBUS
  Top 0.3: 158.38,46.54 158.38,47.23 C4_USB.1 158.44,47.37 160.24,49.17 TP14.TP 160.24,49.31 159.41,50.14 158.31,50.14 D1.5 | 158.38,46.54 158.38,45.36 C5_USB.1 158.44,45.22 159.48,44.18 159.48,42.45 PFMF.050.1.2 | 127.7,47.02 127.7,50.14 126.45,51.38 C1_BAT.1 126.45,51.18 124.44,49.17 122.92,49.17 122.02,50.07 122.02,50.62 121.12,51.52 MCP73831.4 121.05,51.66 120.91,51.8 118.56,51.8 CHG_LED.A 118.49,51.66 118.49,47.58 116.48,45.57 116.48,42.59 D2.2 116.41,42.45 113.99,42.45 R1_PWRUSB.2 | 127.7,47.02 127.7,46.33 Q1.1 | 158.38,46.54 130.61,46.54 130.12,47.02 127.7,47.02
VRTC
  Top 0.3: R_CAPACITOR.1 90.03,57.89 89.12,56.99 88.64,56.99 88.36,56.72 88.36,46.95 87.88,46.47 U3.14 87.81,46.33 87.81,45.84 88.64,45.01 89.06,45.01 89.82,44.25 C8.1 89.96,44.32 92.66,44.32 93.97,45.64 96.33,45.64 C10_SUPERCAP.2
VUSB
  Top 0.3: J2.A9 163.29,56.65 163.29,56.44 J2.B4 163.43,56.37 163.98,56.37 164.19,56.16 164.19,52.15 163.98,51.94 163.43,51.94 J2.B9 163.29,51.87 163.29,51.66 J2.A4 163.15,51.59 162.6,51.59 161.63,50.62 161.63,41.55 160.38,40.3 157.13,40.3 155.05,42.38 PFMF.050.1.1